# Altium PCB SRD Generator PCB.PcbDoc
Units mm, origin at the board's own origin, x right, y up, seen from the top; angles counter-clockwise.
Board outline 70 x 50 mm, 2 copper layers (Top Layer, Bottom Layer), stack 0.83 mm thick; 21 components, 11 nets, 47 pads, 250 vias.
Unrouted connection lines stored in the file: 14.
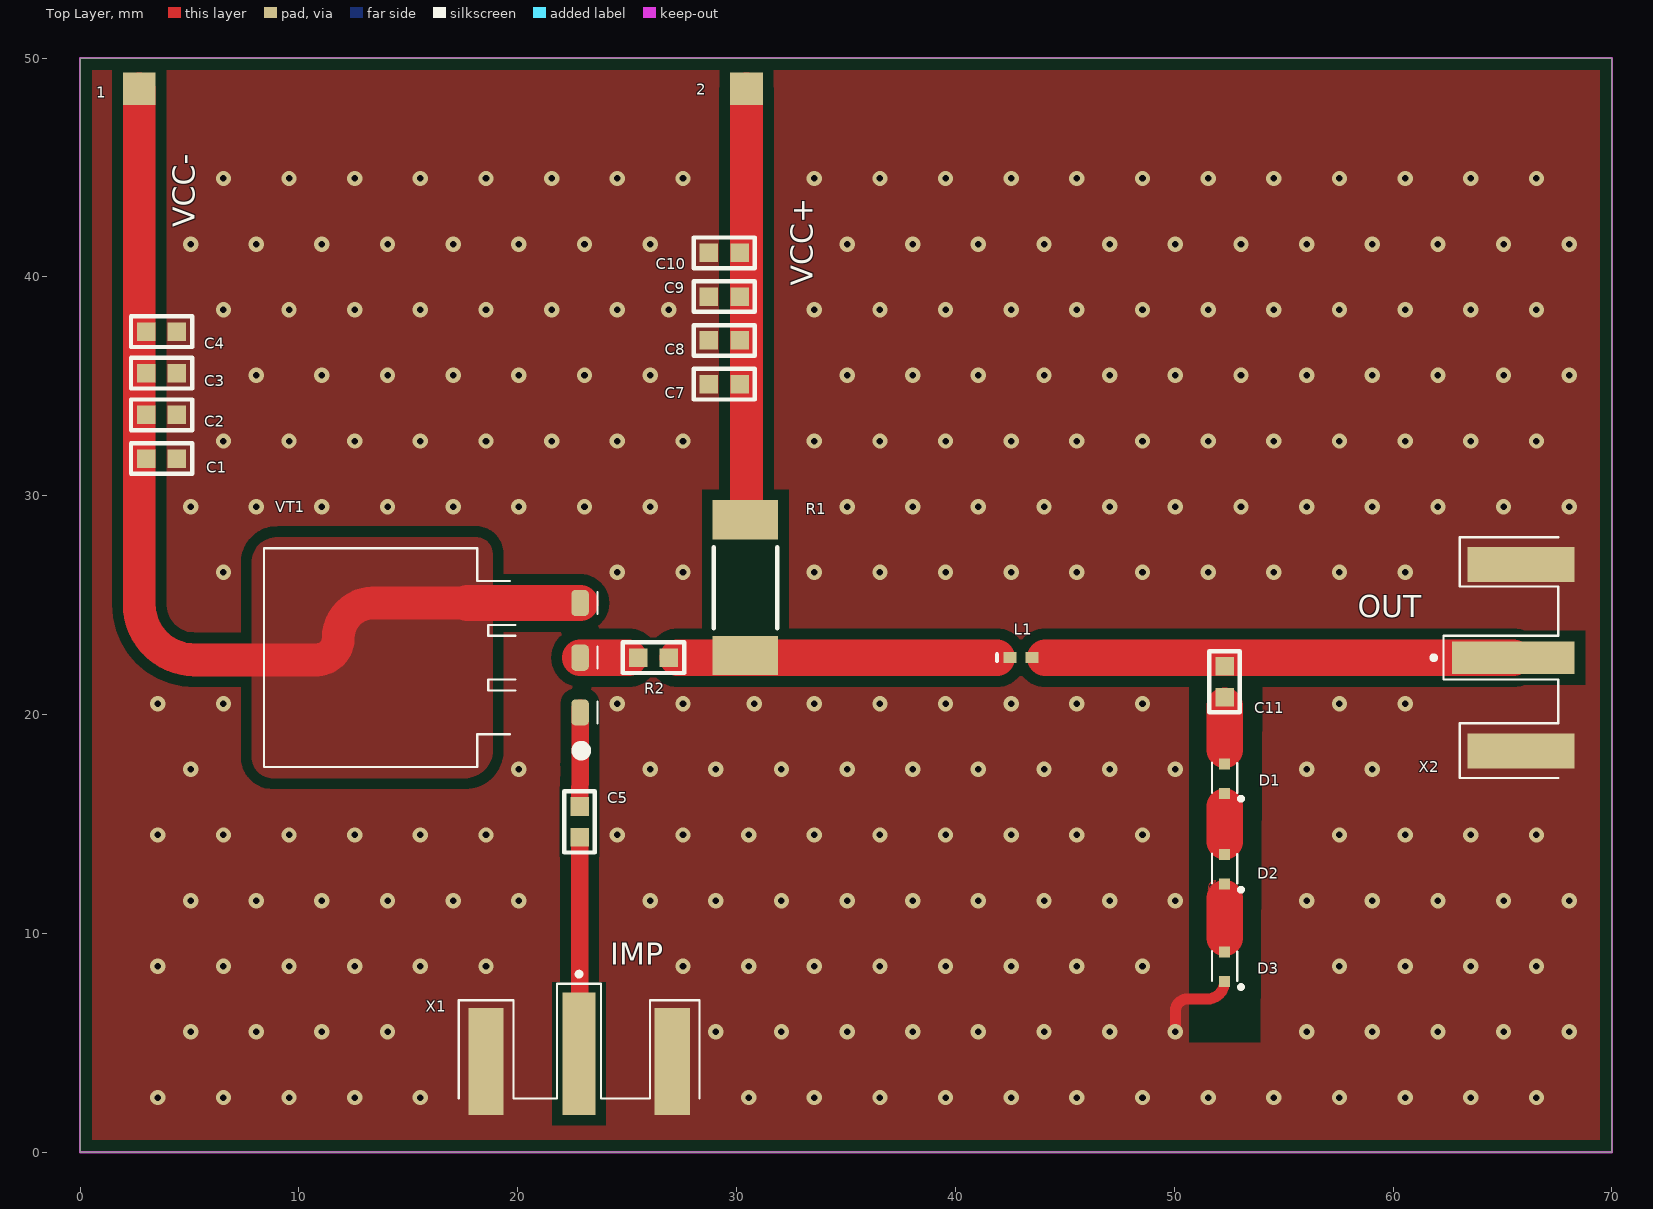
[diagram p0: Top Layer view]
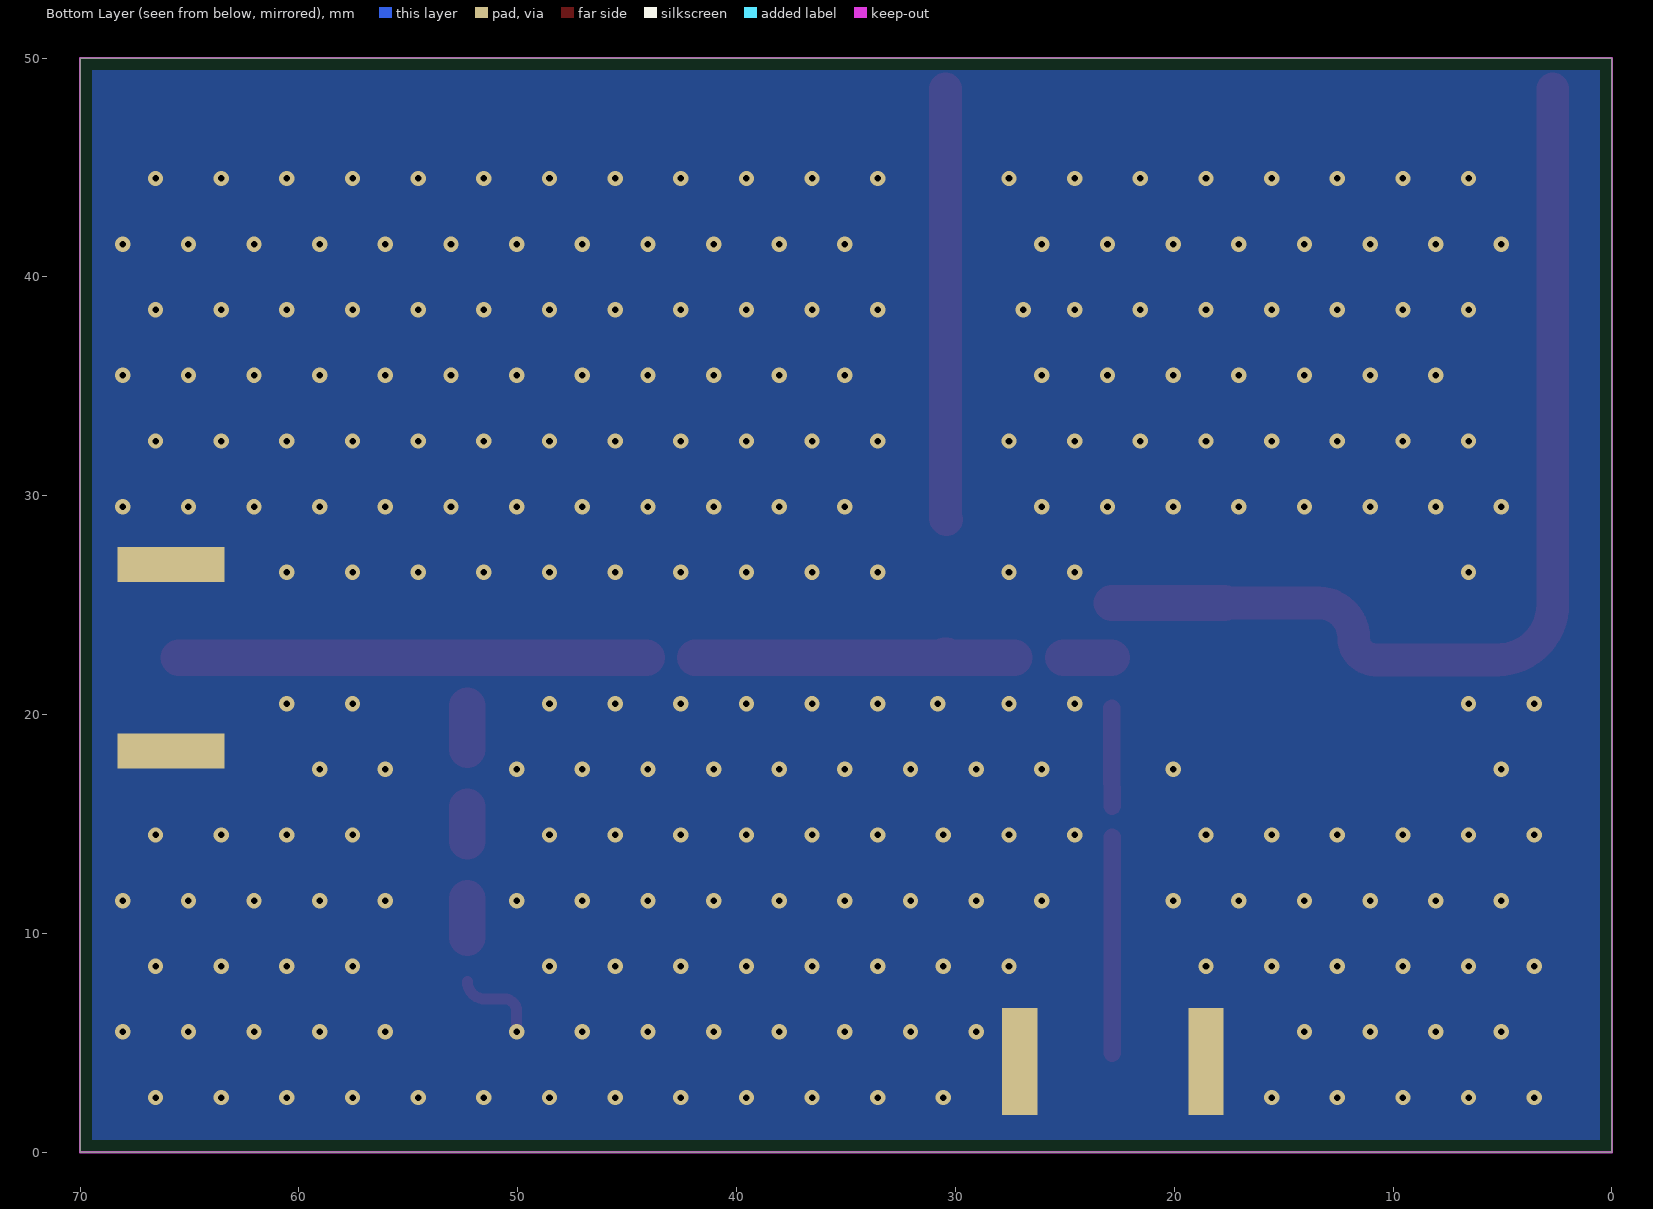
[diagram p1: Bottom Layer view, seen from below]
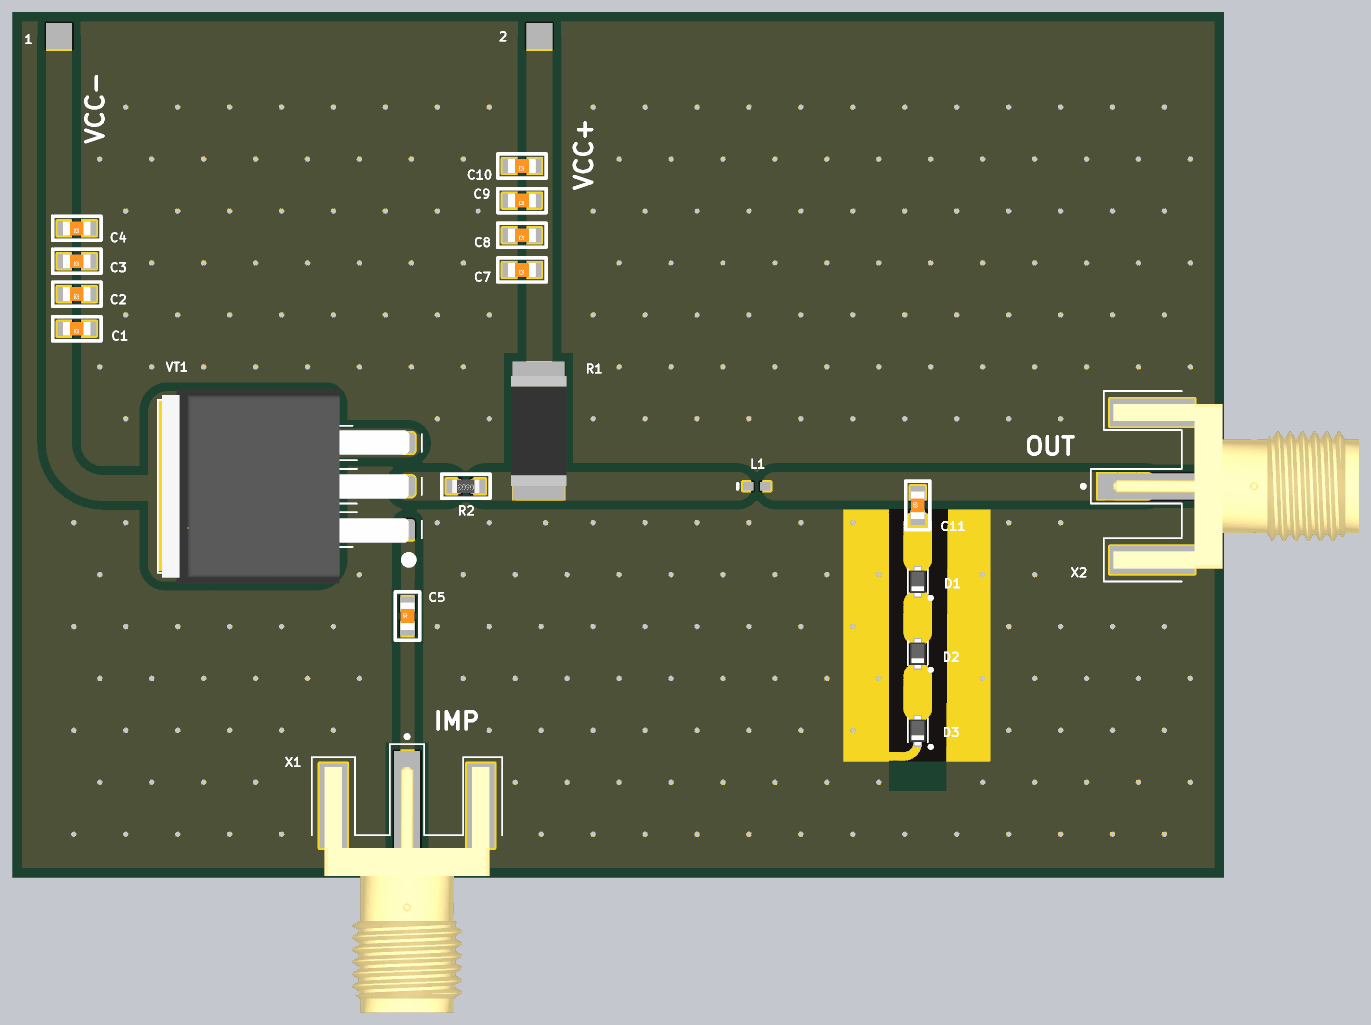
[diagram p2: 3D render of the assembled board from above, using the file's embedded part models]

## Layer stack, top to bottom
Top Solder: solder mask 0.0102, Solder Resist, Dk 3.5
Top Layer: signal copper 0.035
Dielectric 1: dielectric 0.76, 4350B, Dk 3.48
Bottom Layer: signal copper 0.035
Bottom Solder: solder mask 0.0102, Solder Resist, Dk 3.5

## Board outline
0,0 70,0 70,50 0,50

## Design rules (kind name [scope] priority, off if disabled: settings)
Clearance [All] p1: gap=0.3 ignorepadtopadclearanceinfootprint=FALSE except(0.1: Arc-Track Track-Track; 0.5: Arc-Poly Track-Poly SMDPad-Poly THPad-Poly Via-Poly Fill-Poly Poly-Poly)
PlaneConnect [All] p1: planeconnectstyle=Direct reliefexpansion=0.508 reliefentries=4 reliefconductorwidth=0.254 reliefairgap=0.254
PolygonConnect [All] p1: connectstyle=Direct reliefconductorwidth=0.254 reliefentries=4 polygonreliefangle="90 Angle" airgapwidth=0.254
RoomDefinition "SRD Generator scheme" [InComponentClass('SRD Generator scheme')] p1: confinementstyle=ConfineIn formatcopy=TRUE lockcomponents=FALSE outline -0.5,-8.6 78.1,-8.6 78.1,51.1 -0.5,51.1
RoutingVias [All] p1: holewidth=0.711 width=1.27 viastyle="Through Hole" minholewidth=0.3 minwidth=0.3 maxholewidth=3 maxwidth=3
SilkToSolderMaskClearance [IsPad] p1: minsilkscreentomaskgap=0 clearancetoexposedcopper=TRUE
SolderMaskExpansion [All] p1: expansion=0.102 istentingtop=FALSE
Width Width_50Om [InNetClass('50Om')] p1: maxlimit=1.664 minlimit=1.664 preferedwidth=1.664 impedanceprofiledriven=TRUE impedanceprofileid={9FDBCFC4-2877-4F5D-A552-6EE955ECAB4F} impedanceprofilevalue=50.000000 minimp=50.000000 maximp=50.000000 favimp=50.000000
Width [All] p2: maxlimit=5 minlimit=0.3 preferedwidth=0.3
28 further rules are at their usual default settings.

## Classes and differential pairs
net class 50Om: NetC11_1 NetD1_2 NetD2_2 NetL1_1 NetR2_2 OUT

## Components (designator, comment, footprint, x,y, rotation, side; value= is the part's Value field where it differs from the comment)
1 "SMD, 1.5x1.5mm" "Test point Rectan SMD"#1 2.7,48.6 r90 top
2 "SMD, 1.5x1.5mm" "Test point Rectan SMD"#2 30.45,48.75 r90 top
C1 "100 пФ" CH0603C 3.725,31.7 r180 top value="50 нФ"
C2 "1 нФ" CH0603C 3.725,33.7 r180 top value="50 нФ"
C3 "100 нФ" CH0603C 3.725,35.6 r180 top value="50 нФ"
C4 "1 мФ" CH0603C 3.725,37.5 r180 top value="50 нФ"
C5 "50нФ" CH0603C 22.825,15.1 r90 top value="100 нФ"
C7 "100 пФ" CH0603C 29.436,35.1 r180 top value="50 нФ"
C8 "1 нФ" CH0603C 29.436,37.1 r180 top value="50 нФ"
C9 "100 нФ" CH0603C 29.436,39.1 r180 top value="50 нФ"
C10 "1 мФ" CH0603C 29.436,41.1 r180 top value="50 нФ"
C11 "10 нФ" CH0603C 52.3,21.5 r90 top value="50 нФ"
D1 "SRD" "Diode Macom" 52.3,17.75 r270 top
D2 "SRD" "Diode Macom" 52.3,13.6 r270 top
D3 "SRD" "Diode Macom" 52.3,9.15 r270 top
L1 "Inductor" 0402-A 43,22.6 r0 top value="5 нГн"
R1 "27 Ом" R2512 30.4,25.8 r90 top
R2 "21Ом" CH0603R 26.2,22.6 r180 top
VT1 "RD15HVF1" TO220_123 22.9,22.6 r90 top
X1 "SMA" SMA-90deg 22.8,1.7 r0 top
X2 "SMA" SMA-90deg 68.3,22.6 r90 top

## Footprints (in the part's own frame and the unit in brackets; to place one, negate y for a bottom-side part, rotate by r counter-clockwise, add the part's x,y. Pads: shape width x height; smd on the part's side, far side on the other; paste and mask are expansions set on the pad)
0402-A [mm] "Chip Inductor, Body 1.0x0.5mm, IPC High Density"
  rect 0.6x0.5 smd: 1(-0.5,0) 2(0.5,0)
  silkscreen extent -1.1,-0.15 -1.1,0.15, body extent -0.55,-0.3 0.55,0.3, height 0.55
CH0603C [mm] "Chip Capacitor, 2-Leads, Body 1,53x0,85mm, IPC Medium Density"
  rect 0.85x0.85 smd: 1(-0.7,0) 2(0.7,0)
  silkscreen extent -1.4,-0.7 1.4,0.7, body extent -0.8,-0.4 0.8,0.4, height 0.3
CH0603R [mm]
  rect 0.85x0.85 smd: 1(-0.7,0) 2(0.7,0)
  silkscreen extent -1.4,-0.7 1.4,0.7, body extent -0.8,-0.4 0.8,0.4, height 0.44
"Diode Macom" [mm]
  rect 0.5x0.5 smd: 1(0,0) 2(1.35,0)
  silkscreen extent -0.05,-0.58 1.65,0.8, body extent -0.19,-0.45 1.51,0.45, height 0.62
R2512 [mm] "Resistor, 2-Leads, Body 6,40x3,20mm, IPC Medium Density"
  rect 1.8x3 smd mask+0.05: 1(-3.1,0) 2(3.1,0)
  silkscreen extent -1.85,-1.45 1.85,1.45, body extent -3.18,-1.6 3.17,1.6, height 0.57
SMA-90deg [mm]
  rect 1.5x5.6 smd: 1(0,2.8)
  rect 1.6x4.9 smd: 2(-4.26,2.45) 2(4.26,2.45)
  rect 1.6x4.9 smd far side: 2(-4.26,2.45) 2(4.26,2.45)
  silkscreen extent -5.5,0.75 5.5,6.54, body extent -4.76,-9.5 4.76,4.7, height 4.35
"Test point Rectan SMD"#1 [mm]
  rect 1.5x1.5 smd: 1(0,0)
"Test point Rectan SMD"#2 [mm]
  rect 1.5x1.5 smd: 1(-0.15,0)
TO220_123 [mm] "Generic TO-220 case, stay variant"
  rrect50% 1.2x0.8 smd: 1(-2.5,0.05) 2(0,0.05) 3(2.5,0.05)
  silkscreen extent -5,-0.75 5,14.5, body extent -5.61,-0.04 5.6,14.24, height 4.7

## Part data
1 2: library part "Test point Rectan SMD", Part Number="Test point Rectan SMD"
C1 C2 C3 C4 C7 C8 C9 C10 C11: library part Capacitor
C5: library part Capacitor_1
D1 D2 D3: "https://ru.mouser.com/datasheet/2/249/maom_s_a0004987266_1-2274246.pdf"
R1: library part Resistor
R2: library part Resistor_1
VT1: library part "P-chanel -diod", "Mosfet", HelpUrl=http://www.mitsubishielectric.com/semiconductors/content/product/highfrequency/siliconrf/discrete/rd15hvf1.pdf, Model=RD15HVF1
X1 X2: "RF"
L1: Code_IEC=1005, Code_JEITA=0402, LatestRevisionDate=29-May-2009, LatestRevisionNote="IPC-7351 Footprint Added.", PackageDescription="Chip Inductor", PackageReference=0402-A, Published=8-Jun-2000, Publisher="Altium Limited"

## Via types
v1: diameter 0.7, hole 0.3, Top Layer to Bottom Layer, 250 vias

## Nets (pads, with @x,y where several pads share a name; then routed paths per layer and width w, separated by ;. In a path a pad name is that pad's centre, name@x,y a point inside that pad or via, vN(x,y) a via of type N, cw(c..) or ccw(c..) an arc to the next point about the centre after c; other vN are vias at no path point)
GND: C1.1 C2.1 C3.1 C4.1 C7.2 C8.2 C9.2 C10.2 D3.2 X1.2 X2.2 | length 4
  Top Layer w0.5: v1(50.05,5.5) 50.05,6.45 cw(c50.6,6.45) 50.6,7 51.5,7 ccw(c51.5,7.8) D3.2
  other v1: 3.55,2.5 6.55,2.5 9.55,2.5 12.55,2.5 15.55,2.5 30.55,2.5 33.55,2.5 36.55,2.5 39.55,2.5 42.55,2.5 45.55,2.5 48.55,2.5 51.55,2.5 54.55,2.5 57.55,2.5 60.55,2.5 63.55,2.5 66.55,2.5 5.05,5.5 8.05,5.5 11.05,5.5 14.05,5.5 29.05,5.5 32.05,5.5 35.05,5.5 38.05,5.5 41.05,5.5 44.05,5.5 47.05,5.5 56.05,5.5 59.05,5.5 62.05,5.5 65.05,5.5 68.05,5.5 3.55,8.5 6.55,8.5 9.55,8.5 12.55,8.5 15.55,8.5 18.55,8.5 27.55,8.5 30.55,8.5 33.55,8.5 36.55,8.5 39.55,8.5 42.55,8.5 45.55,8.5 48.55,8.5 57.55,8.5 60.55,8.5 63.55,8.5 66.55,8.5 5.05,11.5 8.05,11.5 11.05,11.5 14.05,11.5 17.05,11.5 20.05,11.5 26.05,11.5 29.05,11.5 32.05,11.5 35.05,11.5 38.05,11.5 41.05,11.5 44.05,11.5 47.05,11.5 50.05,11.5 56.05,11.5 59.05,11.5 62.05,11.5 65.05,11.5 68.05,11.5 3.55,14.5 6.55,14.5 9.55,14.5 12.55,14.5 15.55,14.5 18.55,14.5 24.55,14.5 27.55,14.5 30.55,14.5 33.55,14.5 36.55,14.5 39.55,14.5 42.55,14.5 45.55,14.5 48.55,14.5 57.55,14.5 60.55,14.5 63.55,14.5 66.55,14.5 5.05,17.5 20.05,17.5 26.05,17.5 29.05,17.5 32.05,17.5 35.05,17.5 38.05,17.5 41.05,17.5 44.05,17.5 47.05,17.5 50.05,17.5 56.05,17.5 59.05,17.5 3.55,20.5 6.55,20.5 24.55,20.5 27.55,20.5 30.8,20.5 33.55,20.5 36.55,20.5 39.55,20.5 42.55,20.5 45.55,20.5 48.55,20.5 57.55,20.5 60.55,20.5 6.55,26.5 24.55,26.5 27.55,26.5 33.55,26.5 36.55,26.5 39.55,26.5 42.55,26.5 45.55,26.5 48.55,26.5 51.55,26.5 54.55,26.5 57.55,26.5 60.55,26.5 5.05,29.5 8.05,29.5 11.05,29.5 14.05,29.5 17.05,29.5 20.05,29.5 23.05,29.5 26.05,29.5 35.05,29.5 38.05,29.5 41.05,29.5 44.05,29.5 47.05,29.5 50.05,29.5 53.05,29.5 56.05,29.5 59.05,29.5 62.05,29.5 65.05,29.5 68.05,29.5 6.55,32.5 9.55,32.5 12.55,32.5 15.55,32.5 18.55,32.5 21.55,32.5 24.55,32.5 27.55,32.5 33.55,32.5 36.55,32.5 39.55,32.5 42.55,32.5 45.55,32.5 48.55,32.5 51.55,32.5 54.55,32.5 57.55,32.5 60.55,32.5 63.55,32.5 66.55,32.5 8.05,35.5 11.05,35.5 14.05,35.5 17.05,35.5 20.05,35.5 23.05,35.5 26.05,35.5 35.05,35.5 38.05,35.5 41.05,35.5 44.05,35.5 47.05,35.5 50.05,35.5 53.05,35.5 56.05,35.5 59.05,35.5 62.05,35.5 65.05,35.5 68.05,35.5 6.55,38.5 9.55,38.5 12.55,38.5 15.55,38.5 18.55,38.5 21.55,38.5 24.55,38.5 26.9,38.5 33.55,38.5 36.55,38.5 39.55,38.5 42.55,38.5 45.55,38.5 48.55,38.5 51.55,38.5 54.55,38.5 57.55,38.5 60.55,38.5 63.55,38.5 66.55,38.5 5.05,41.5 8.05,41.5 11.05,41.5 14.05,41.5 17.05,41.5 20.05,41.5 23.05,41.5 26.05,41.5 35.05,41.5 38.05,41.5 41.05,41.5 44.05,41.5 47.05,41.5 50.05,41.5 53.05,41.5 56.05,41.5 59.05,41.5 62.05,41.5 65.05,41.5 68.05,41.5 6.55,44.5 9.55,44.5 12.55,44.5 15.55,44.5 18.55,44.5 21.55,44.5 24.55,44.5 27.55,44.5 33.55,44.5 36.55,44.5 39.55,44.5 42.55,44.5 45.55,44.5 48.55,44.5 51.55,44.5 54.55,44.5 57.55,44.5 60.55,44.5 63.55,44.5 66.55,44.5
IMP: C5.1 X1.1 | length 9.9
  Top Layer w0.8: X1.1@22.825,4.525 C5.1
NetC5_2: C5.2 VT1.1 | length 4.5
  Top Layer w0.8: C5.2 22.85,17.713 ccw(c22.05,17.725) 22.85,17.725 VT1.1@22.85,20.3
NetC11_1: C11.1 D1.1 | length 2
  Top Layer w1.664: 52.3,18.4 C11.1@52.3,20.4
NetD1_2: D1.2 D2.1 | length 1.6
  Top Layer w1.664: 52.3,14.2 52.3,15.8
NetD2_2: D2.2 D3.1 | length 1.8
  Top Layer w1.664: 52.3,9.8 52.3,11.6
NetL1_1: L1.1 R1.1 R2.1 | length 14.8
  Top Layer w1.664: R2.1@27.3,22.6 30.4,22.6 41.9,22.6 ; R1.1 30.482,22.7 R1.1@30.55,22.632
NetR2_2: R2.2 VT1.2 | length 2.2
  Top Layer w1.664: VT1.2 R2.2@25.075,22.6
OUT: C11.2 L1.2 X2.1 | length 21.4
  Top Layer w1.664: 44.1,22.6 52.3,22.6 X2.1
VCC+: 2.1 C7.1 C8.1 C9.1 C10.1 R1.2 | length 19.7
  Top Layer w1.5: R1.2 30.45,28.95 2.1
VCC-: 1.1 C1.2 C2.2 C3.2 C4.2 VT1.3 | length 46.6
  Top Layer w1.5: 1.1 2.7,37.5 2.7,35.6 2.7,33.7 2.7,31.7 2.7,25.04 ccw(c5.24,25.04) 5.24,22.5 10.8,22.5 ccw(c10.8,23.5) 11.8,23.5 cw(c13.4,23.5) 13.4,25.1 17.7,25.1
  Top Layer w1.664: 17.7,25.1 VT1.3

## Polygon pours and split planes (outlines as drawn)
GND on Top Layer "GND_L01_P074" (solid, pour order 74): 0,0 70,0 70,50 0,50
VCC- on Top Layer "VCC-_L01_P069" (solid, pour order 69): 9,28.1 18.1,28.1 cw(c18.1,27.35) 18.85,27.35 18.85,18.35 cw(c17.6,18.35) 17.6,17.1 8.8,17.1 cw(c8.8,18.05) 7.85,18.05 7.85,26.95 cw(c9,26.95)
VCC- on Top Layer "VCC-_L01_P072" (solid, pour order 72): 9,28.1 18.1,28.1 cw(c18.1,27.35) 18.85,27.35 18.85,18.35 cw(c17.6,18.35) 17.6,17.1 8.8,17.1 cw(c8.8,18.05) 7.85,18.05 7.85,26.95 cw(c9,26.95)
no net on Top Layer "NONET_L01_P061" (solid, pour order 61): 22.625,20.425 22.625,20.45 22.65,20.45
GND on Top Layer "NONET_L01_P052" (solid, shelved, pour order 52): 51.897,12.403 ccw(c51.897,12.053) 51.547,12.053 51.547,12.028
no net on Top Solder "NONET_L-01_P-001" (solid): 48,21.3 56.5,21.3 56.5,6.7 48,6.7
no net on Top Solder "NONET_L-01_P-001" (solid): 8.4,27.5 8.5,27.6 18.4,27.6 18.4,17.7 8.4,17.7
GND on Bottom Layer "GND_L02_P070" (solid, pour order 70): 0,0 70,0 70,50 0,50

## Keep-outs
Keep-Out Layer:
  the board outline again, w0.1

## Other copper
Top Layer:
  pour cut-out: 28.4,27.5 28.4,23.944 32.4,23.944 32.4,27.5
  pour cut-out: 50.653,21.25 54.038,21.25 53.947,5 50.653,5

## Silkscreen, mask and mechanical layers (free items; w line width, h text height)
Top Overlay:
  text "VCC-" at 5.25,42.275 h1 r90
  text "VCC+" at 33.475,39.6 h1 r90
  text "OUT" at 58.375,24.45 h1
  text "IMP" at 24.225,8.575 h1

## Dimensions
70,50 to 70,0 on Dimensions
0,0 to 70,0 on Dimensions